# Altium PCB pcb.PcbDoc
Units mm, origin at the board's own origin, x right, y up, seen from the top; angles counter-clockwise.
Board outline 37.77 x 38.74 mm, 2 copper layers (Top Layer, Bottom Layer); 52 components, 48 nets, 239 pads, 66 vias.
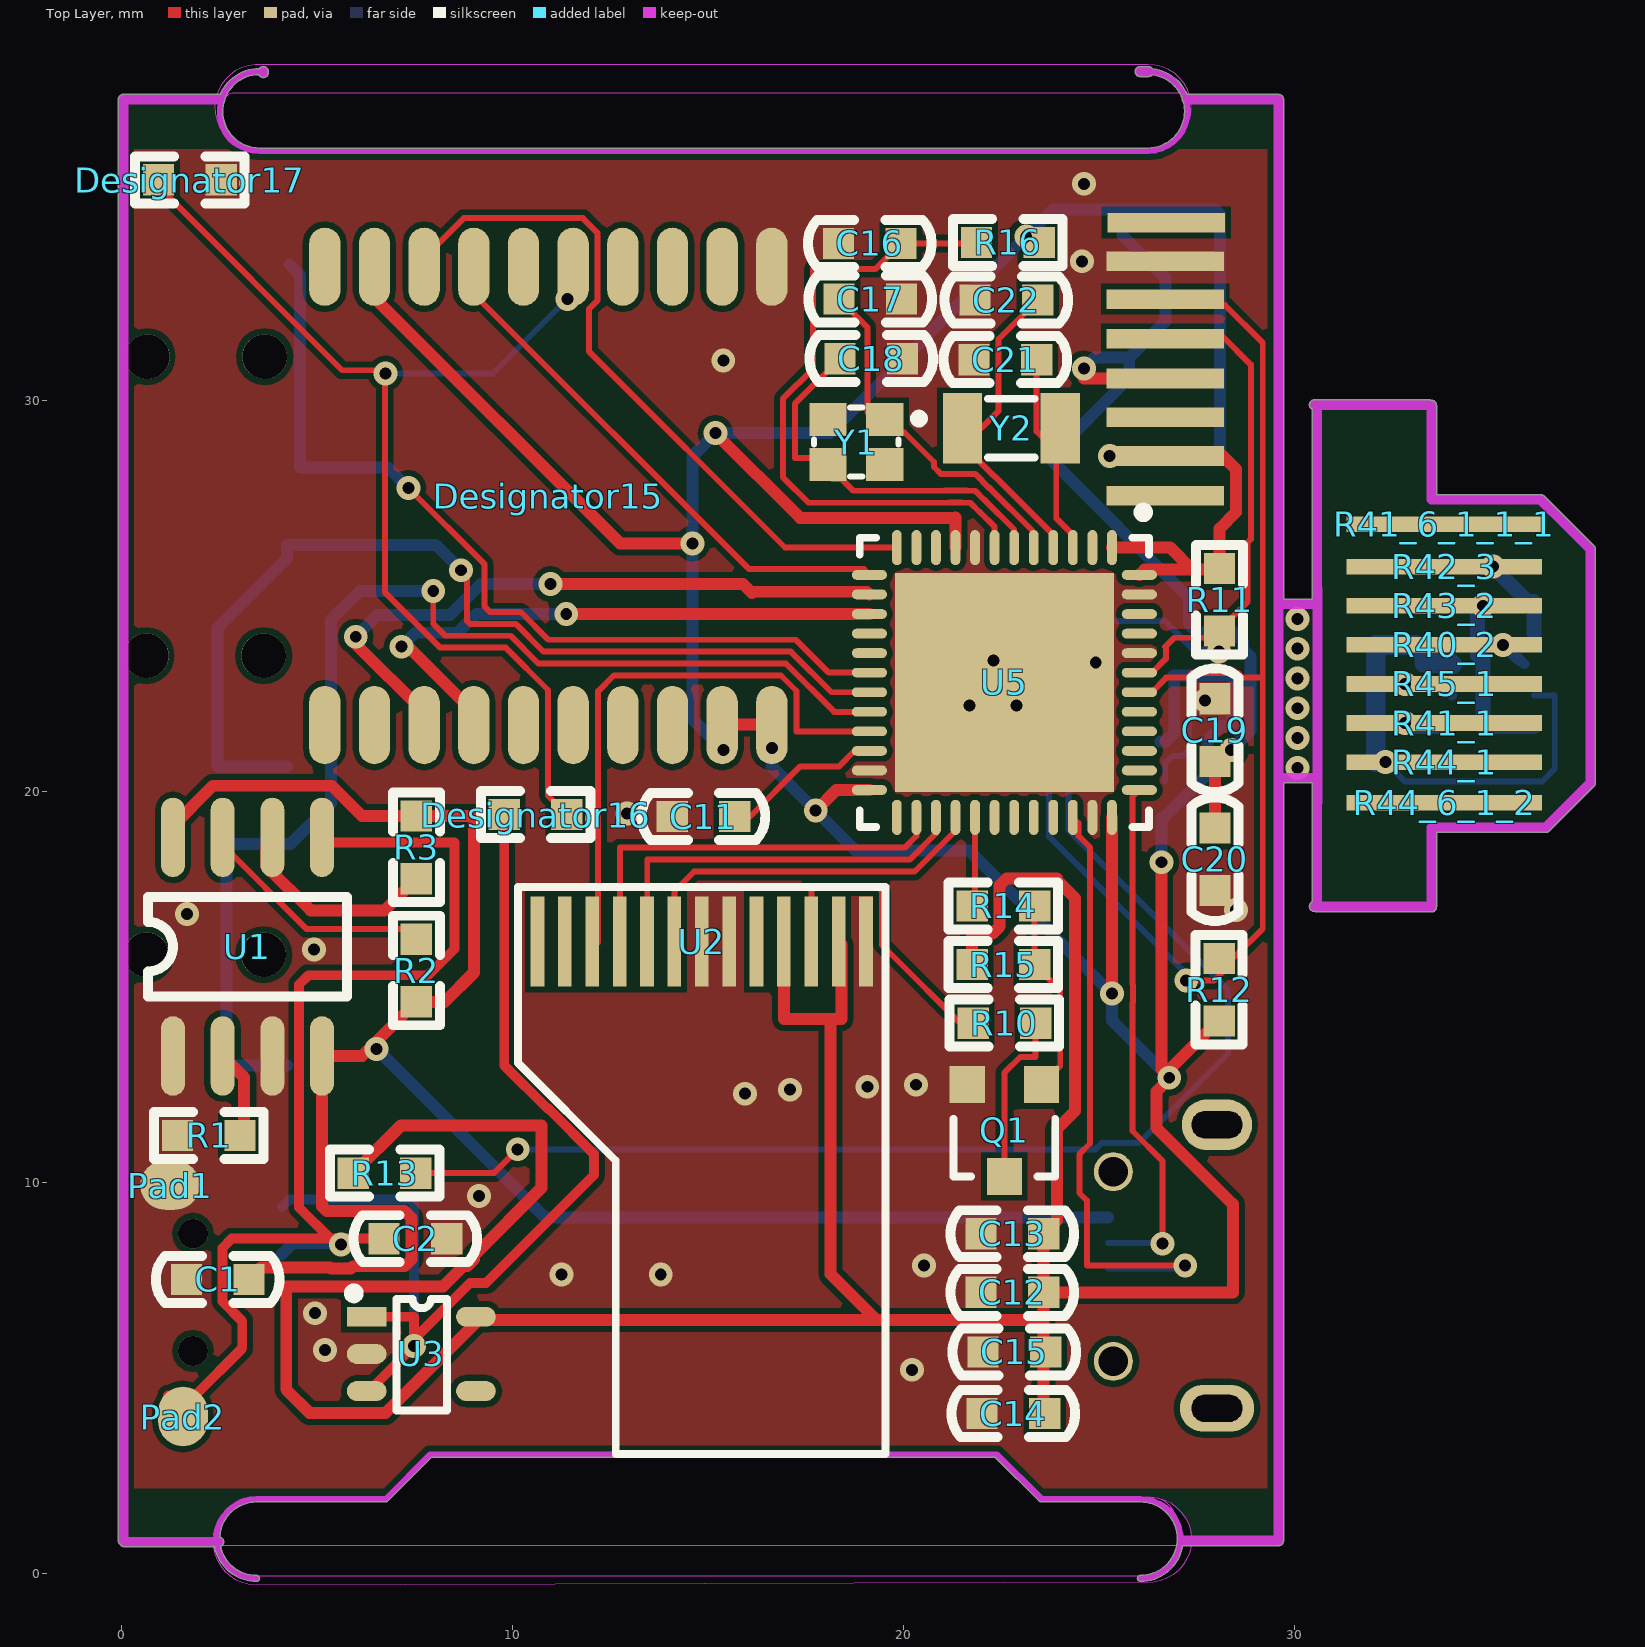
[diagram p0: Top Layer view]
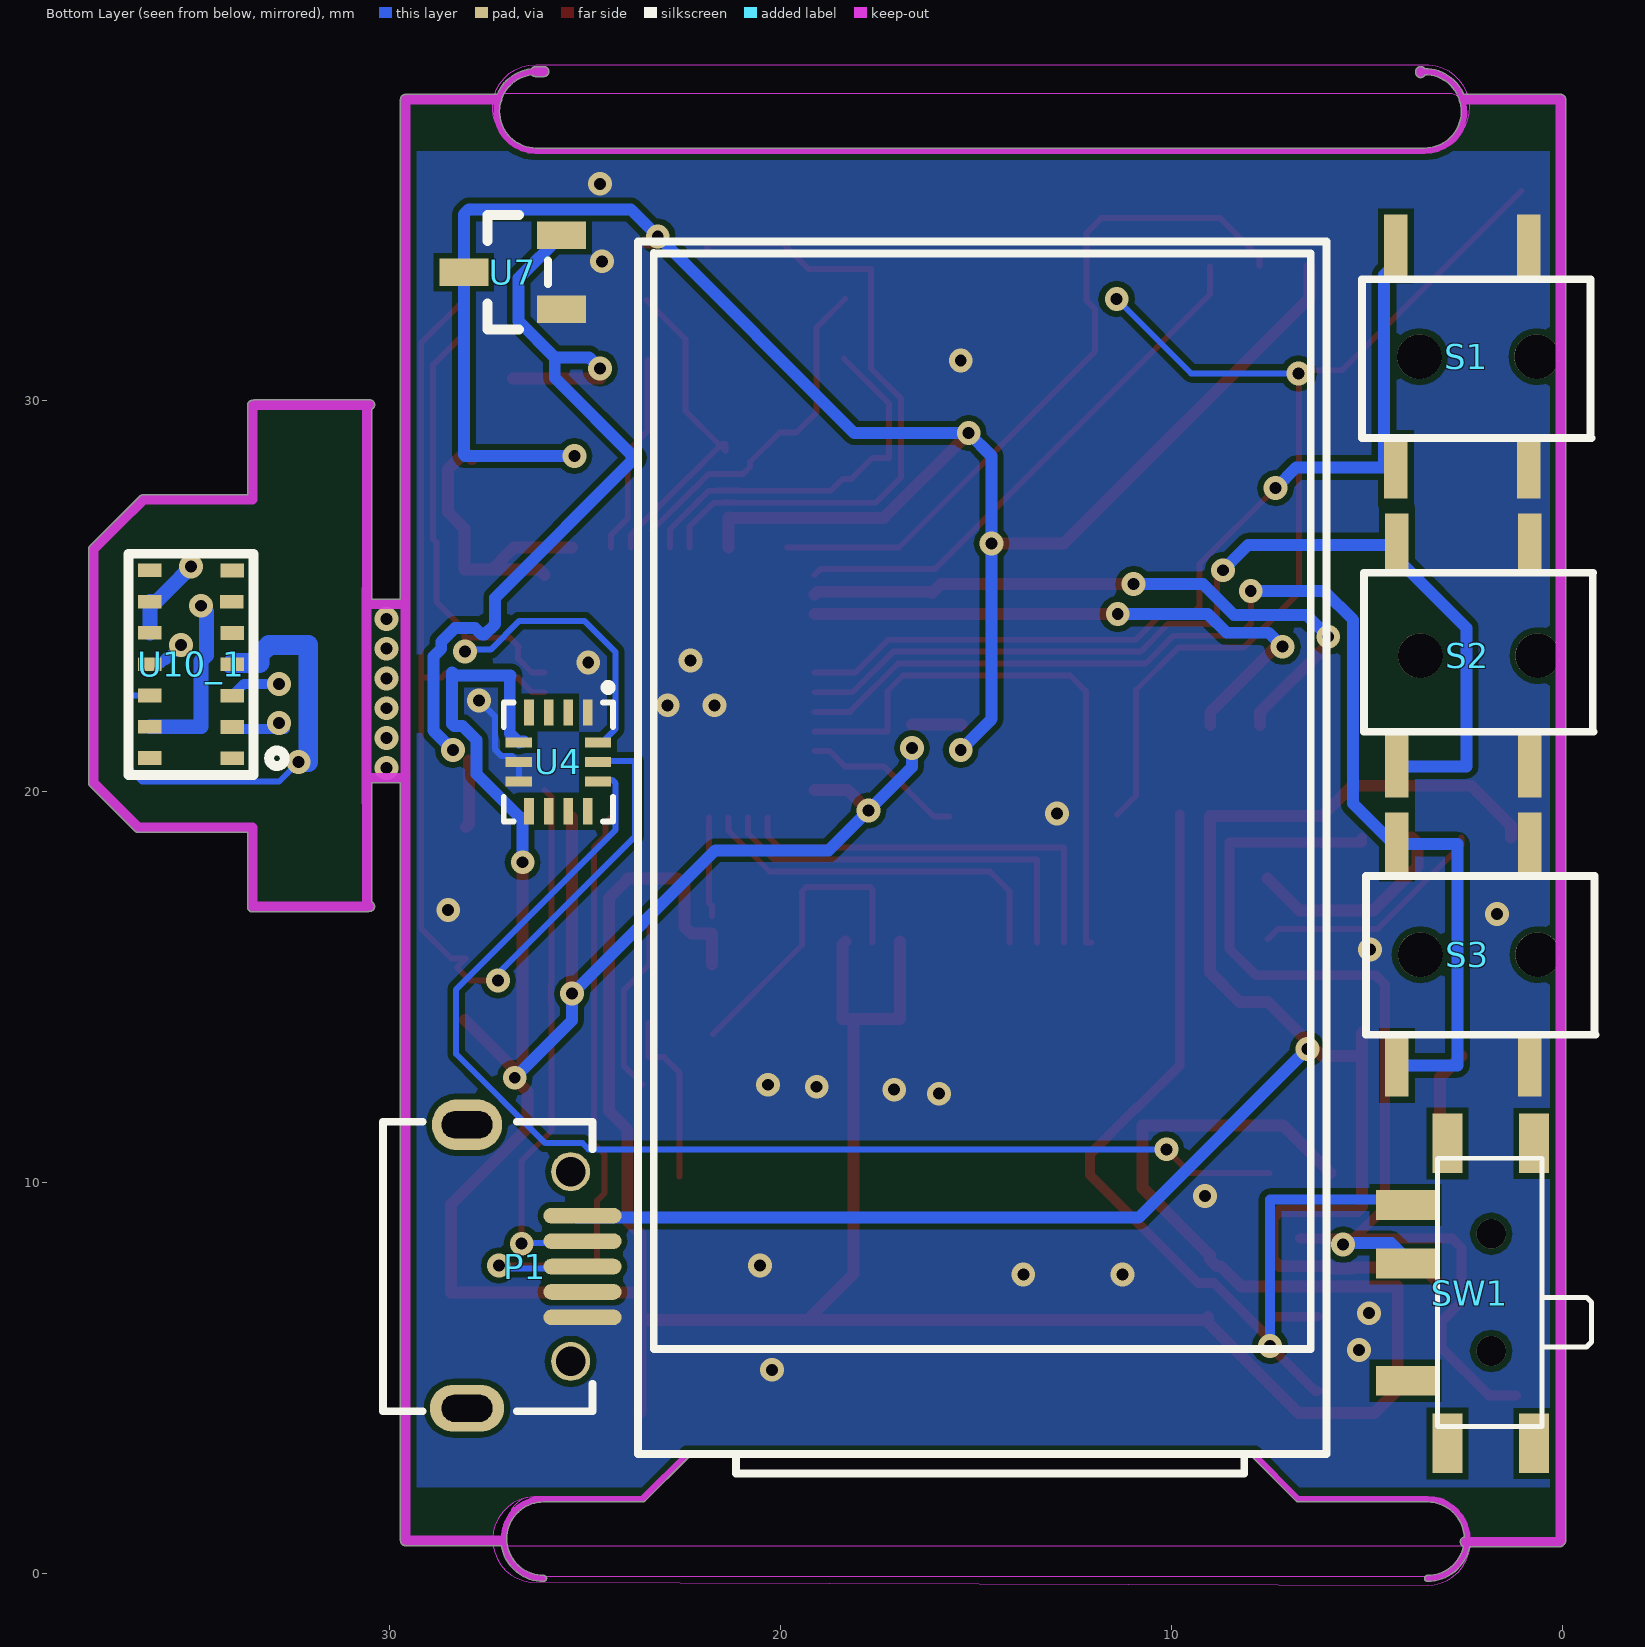
[diagram p1: Bottom Layer view, seen from below]
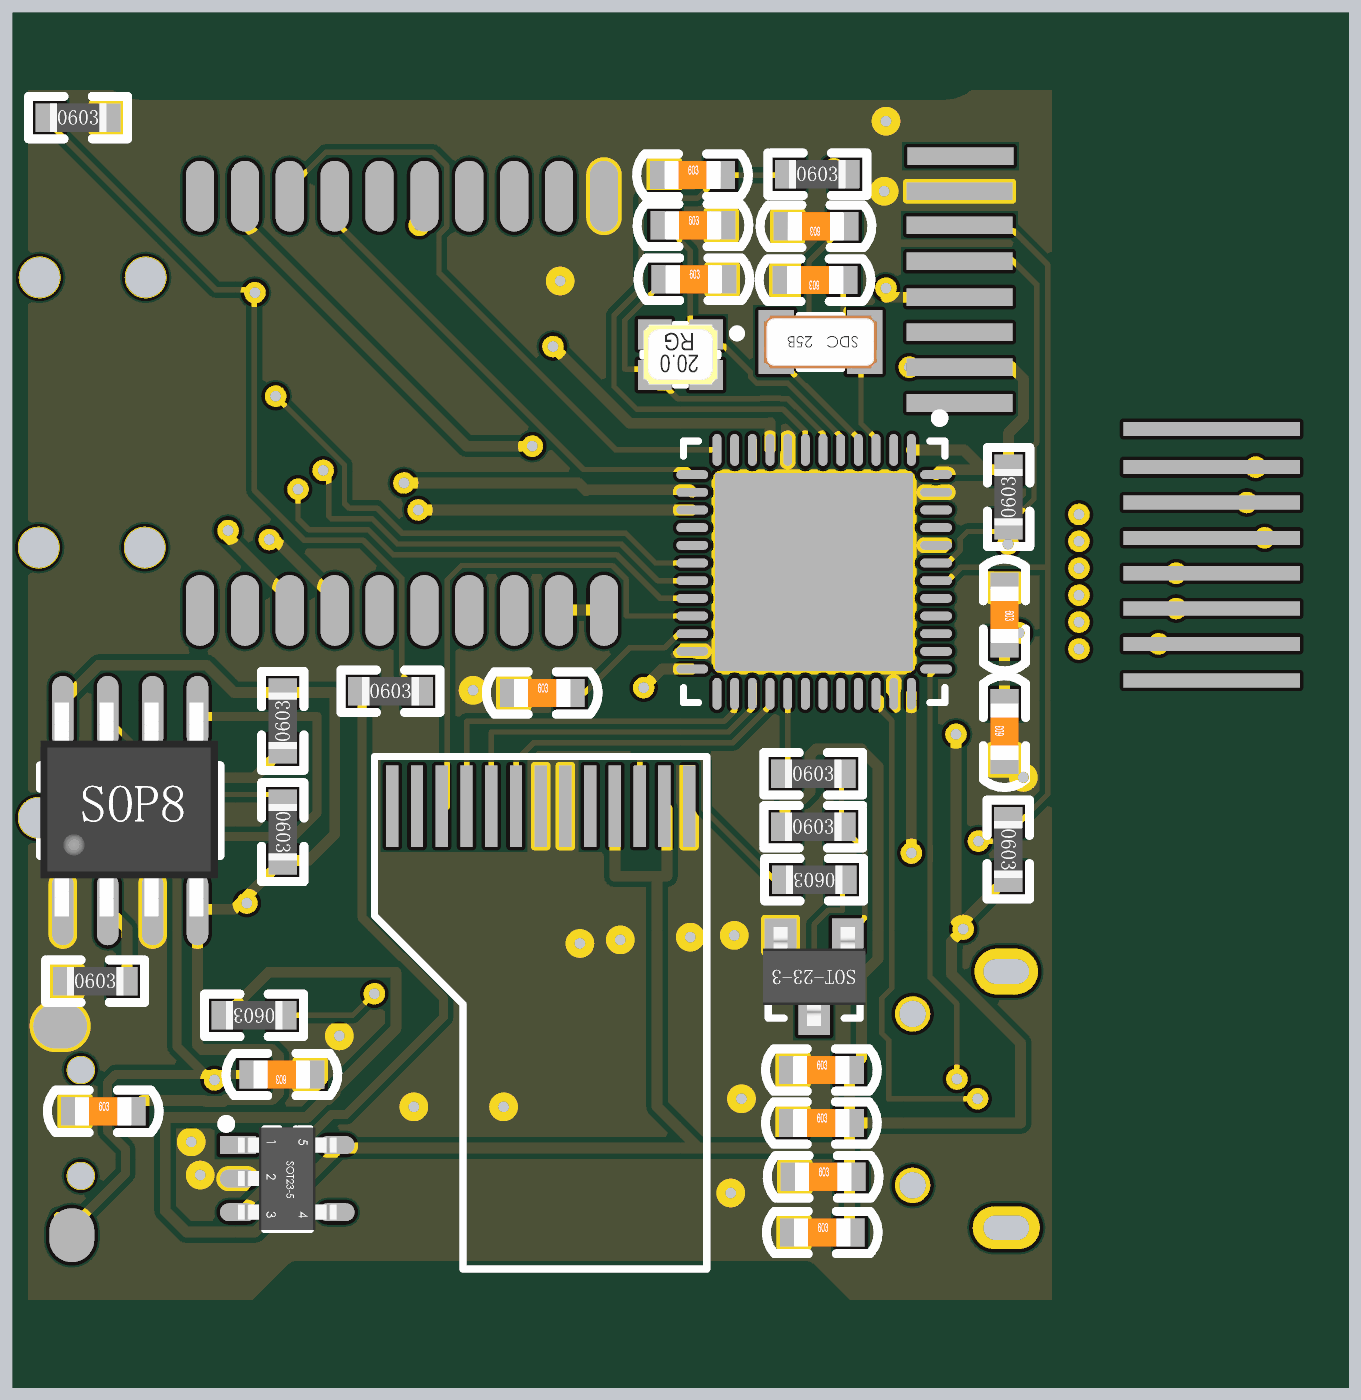
[diagram p2: 3D render of the assembled board from above, using the file's embedded part models]

## Layer stack, top to bottom
Top Solder: solder mask 0.0102, Solder Resist, Dk 3.5
Top Layer: signal copper 0.0356
Dielectric 1: dielectric 0.32, FR-4, Dk 4.8
Bottom Layer: signal copper 0.0356
Bottom Solder: solder mask 0.0102, Solder Resist, Dk 3.5

## Board outline
0.083,0.679 2.382,0.679 ccw(c3.454,0.889) 3.454,-0.204 ccw(c3.454,-0.127) 3.531,-0.127 ccw(c3.454,-0.127) 3.454,-0.05 cw(c3.454,0.889) 2.537,0.688 ccw(c2.489,0.806) 2.617,0.806 ccw(c2.489,0.806) 2.516,0.931 cw(c3.454,0.889) 3.454,1.828 6.756,1.828 ccw(c6.756,1.905) 6.811,1.851 7.931,2.971 22.346,2.971 23.466,1.851 ccw(c23.52,1.905) 23.52,1.828 26.06,1.828 cw(c26.06,0.889) 27,0.889 cw(c26.06,0.889) 26.06,-0.05 ccw(c26.06,-0.127) 26.06,-0.204 ccw(c26.06,0.889) 27.139,0.713 ccw(c27.159,0.838) 27.159,0.711 29.591,0.711 ccw(c29.591,0.838) 29.718,0.838 29.718,20.218 30.449,20.218 30.449,17.17 ccw(c30.507,17.056) 30.507,16.929 30.521,16.929 ccw(c30.577,17.043) 30.577,16.916 33.503,16.916 ccw(c33.503,17.043) 33.63,17.043 33.63,18.948 36.424,18.948 ccw(c36.424,19.075) 36.514,18.986 36.514,18.985 37.657,20.128 37.656,20.128 ccw(c37.567,20.218) 37.694,20.218 37.694,26.187 ccw(c37.567,26.187) 37.656,26.278 37.657,26.277 36.387,27.547 ccw(c36.297,27.457) 36.297,27.585 33.63,27.585 33.63,29.87 ccw(c33.503,29.87) 33.49,29.997 ccw(c33.433,29.883) 33.433,30.011 30.507,30.011 ccw(c30.507,29.883) 30.449,29.77 30.449,24.918 29.718,24.918 29.718,37.694 ccw(c29.591,37.694) 29.591,37.821 27.258,37.821 ccw(c27.258,37.694) 27.251,37.821 ccw(c26.248,37.389) 26.37,38.475 ccw(c26.264,38.405) 26.264,38.532 26.054,38.532 ccw(c26.054,38.405) 26.054,38.277 26.264,38.277 ccw(c26.264,38.405) 26.36,38.322 cw(c26.248,37.389) 27.131,37.709 ccw(c27.258,37.694) 27.161,37.611 cw(c26.248,37.389) 27.187,37.389 cw(c26.248,37.389) 26.263,36.449 cw(c26.248,37.389) 26.262,36.449 26.264,36.449 3.531,36.449 cw(c3.531,37.389) 2.618,37.61 ccw(c2.521,37.694) 2.649,37.694 ccw(c2.521,37.694) 2.648,37.71 cw(c3.531,37.389) 3.516,38.328 ccw(c3.632,38.379) 3.76,38.379 3.76,38.405 ccw(c3.632,38.405) 3.53,38.481 ccw(c3.531,37.389) 2.527,37.821 ccw(c2.521,37.694) 2.521,37.821 0.051,37.821 ccw(c0.051,37.694) -0.077,37.694 -0.077,0.838 ccw(c0.051,0.838) -0.022,0.733 ccw(c0.083,0.806)
cut-out: 2.464,0.711 cw(c3.111,1.003) 2.819,1.651 cw(c3.264,1.46) 3.454,1.905 6.756,1.905 7.899,3.048 22.377,3.048 23.52,1.905 26.06,1.905 cw(c26.314,1.292) 26.568,1.905 cw(c26.317,1.298) 26.96,1.434 cw(c26.623,1.078) 27.113,1.092 cw(c26.653,0.902) 27.113,0.711 21.666,0.711 17.145,0.711 8.128,0.711 5.182,0.711
cut-out: 3.505,36.379 26.238,36.379 ccw(c26.33,37.227) 27.178,37.135 ccw(c26.819,37.493) 27.178,37.852 23.978,37.852 14.503,37.852 5.512,37.852 2.819,37.852 ccw(c3.013,37.328) 2.489,37.135 ccw(c3.375,37.265)
cut-out: 3.505,-0.076 cw(c3.505,0.94) 3.505,1.956 6.807,1.956 7.95,3.099 22.428,3.099 23.571,1.956 26.111,1.956 cw(c26.111,0.94) 26.111,-0.076
cut-out: 3.454,-0.305 cw(c3.48,0.825) 3.505,1.956 6.807,1.956 7.95,3.099 22.428,3.099 23.571,1.956 26.135,1.956 cw(c26.263,0.864) 26.391,-0.229
cut-out: 3.543,36.398 26.276,36.398 ccw(c26.27,37.49) 26.263,38.582 3.43,38.582 ccw(c3.487,37.49)

## Design rules (kind name [scope] priority, off if disabled: settings)
Clearance [All] p1: gap=0.152
ComponentClearance [All] p1 off: gap=0.254 collisioncheckmode=3 verticalgap=0.254 showdistances=FALSE
HoleSize [All] p1 off: absolutevalues=TRUE maxlimit=2.54 minlimit=0.025 maxpercent=80.000 minpercent=20.000
HoleToHoleClearance [All] p1 off: gap=0.254 allowstackedmicrovias=TRUE
LayerPairs [All] p1 off: enforce=TRUE
MinimumSolderMaskSliver [All] p1 off: minsoldermaskwidth=0.254
NetAntennae [All] p1 off: netantennaetolerance=0
PlaneConnect [All] p1: planeconnectstyle=Direct reliefexpansion=0.508 reliefentries=4 reliefconductorwidth=0.254 reliefairgap=0.254
PolygonConnect [All] p1: connectstyle=Direct reliefconductorwidth=0.254 reliefentries=4 polygonreliefangle="90 Angle" airgapwidth=0.254
RoutingVias [All] p1: holewidth=0.305 width=0.61 viastyle="Through Hole" minholewidth=0.305 minwidth=0.61 maxholewidth=0.305 maxwidth=0.61
SilkToSilkClearance [All] p1 off: silktosilkclearance=0.254
SilkToSolderMaskClearance [IsPad] p1 off: minsilkscreentomaskgap=0.254 clearancetoexposedcopper=TRUE
SolderMaskExpansion [All] p1: expansion=0.102
Width [All] p1: maxlimit=2.54 minlimit=0.152 preferedwidth=0.254
21 further rules are at their usual default settings.

## Components (designator, comment, footprint, x,y, rotation, side; value= is the part's Value field where it differs from the comment)
C1 "10uf" 电容_C0603 2.464,7.518 r0 top
C2 "10uf" 电容_C0603 7.518,8.56 r180 top
C11 "2.2uF" 电容_C0603 14.884,19.355 r0 top
C12 "1uF" 电容_C0603 22.784,7.188 r0 top
C13 "1uF" 电容_C0603 22.784,8.687 r0 top
C14 "1uF" 电容_C0603 22.809,4.089 r0 top
C15 "1uF" 电容_C0603 22.835,5.664 r0 top
C16 "100nf" 电容_C0603 19.139,34.011 r0 top
C17 "22pf" 电容_C0603 19.152,32.588 r0 top
C18 "22pf" 电容_C0603 19.177,31.064 r0 top
C19 "100nf" 电容_C0603 27.965,21.565 r270 top
C20 "10uf" 电容_C0603 27.965,18.263 r90 top
C21 "22pf" 电容_C0603 22.606,31.039 r180 top
C22 "22pf" 电容_C0603 22.631,32.563 r180 top
Designator15 "Comment" HDR10_1.27 5.156,34.011 r0 top
Designator16 "10K" 电阻_R0603 10.592,19.406 r0 top
Designator17 "10K" 电阻_R0603 1.753,35.636 r0 top
P1 "MICRO USB" USB 28.042,7.874 r270 bottom
Pad1 "GND" Pad_A 1.245,9.931 r180 top
Pad2 "BAT" Pad_A 1.575,4.013 r270 top
Q1 "S8050" 三极管_SOT-23 22.581,11.328 r180 top
R1 "1.2k" 电阻_R0603 2.235,11.201 r0 top
R2 "2k" 电阻_R0603 7.544,15.418 r270 top
R3 "2k" 电阻_R0603 7.544,18.567 r90 top
R10 "10R" 电阻_R0603 22.581,14.072 r180 top
R11 "10k" 电阻_R0603 28.082,24.9 r90 top
R12 "10k" 电阻_R0603 28.072,14.927 r270 top
R13 "10k" 电阻_R0603 6.731,10.236 r180 top
R14 "1K" 电阻_R0603 22.555,17.069 r0 top
R15 "10K" 电阻_R0603 22.555,15.57 r0 top
R16 "10K" 电阻_R0603 22.67,34.036 r0 top
R40_2 "Res1" 0603_R#1 35.005,17.196 r180 bottom (schematic designator R34)
R41_1 "Res1" 0603_R#2 34.827,14.147 r180 bottom (schematic designator R34)
R41_6_1_1_1 "Res1" 0603_R#3 38.383,19.227 r180 bottom (schematic designator R34)
R42_3 "Res1" 0603_R#4 35.005,20.245 r180 bottom (schematic designator R34)
R43_2 "Res1" 0603_R#5 34.827,18.721 r180 bottom (schematic designator R34)
R44_1 "Res1" 0603_R#6 34.577,17.245 r180 bottom (schematic designator R34)
R44_6_1_2 "Res1" 0603_R#7 38.063,16.21 r180 bottom (schematic designator R34)
R45_1 "Res1" 0603_R#8 34.827,15.671 r180 bottom (schematic designator R34)
S1 "SW-PB" KEY_3.5*4.7 0.914,31.115 r270 bottom
S2 "SW-PB" KEY_3.5*4.7 0.889,23.47 r270 bottom
S3 "SW-PB" KEY_3.5*4.7 0.889,15.824 r270 bottom
SW1 "SPDT" 贴片开关 -0.229,4.14 r90 bottom
U1 "TP4056" SOP8 1.295,13.259 r90 top
U2 "IPS-LCD" 1.14IPS-LCD 32.042,9.454 r270 bottom
U3 "Comment" SOT23-5 7.671,5.613 r0 top
U4 "BMI160" LGA-14_L3.0-W2.5-P0.50-BL 25.679,20.752 r0 bottom
U5 "STM32F401CCU6" STM-UFQFPN48_N 22.581,22.784 r270 top
U7 "1.8V" SOT-23-3_L2.9-W1.6-P1.90-LS2.8-BR 26.848,33.274 r180 bottom
U10_1 "MAX30100" SENSOR-SMD_MAX30100EFD+ 35.077,23.245 r90 bottom (schematic designator U10)
Y1 "XTAL" 晶振_2016 18.796,28.931 r180 top
Y2 "32.768K" 晶振_3215 22.758,29.286 r180 top

## Footprints (in the part's own frame and the unit in brackets; to place one, negate y for a bottom-side part, rotate by r counter-clockwise, add the part's x,y. Pads: shape width x height; smd on the part's side, far side on the other; paste and mask are expansions set on the pad)
1.14IPS-LCD [mm] "1.14寸IPS-LCD裸屏SPI接口"
  rect 2.3x0.35 smd far side: 1(-6.7,21.4) 2(-6.7,20.7) 3(-6.7,20) 4(-6.7,19.3) 5(-6.7,18.6) 6(-6.7,17.9) 7(-6.7,17.2) 8(-6.7,16.5) 9(-6.7,15.8) 10(-6.7,15.1) 11(-6.7,14.4) 12(-6.7,13.7) 13(-6.7,13)
  silkscreen extent -24.6,8.4 6.9,26
0603_R#1 [mm]
  rect 5x0.4 smd far side: 2(1.179,6.549)
0603_R#2 [mm]
  rect 5x0.4 smd far side: 2(1,7.599)
0603_R#3 [mm]
  rect 5x0.4 smd far side: 2(4.556,7.599)
0603_R#4 [mm]
  rect 5x0.4 smd far side: 2(1.179,5.5)
0603_R#5 [mm]
  rect 5x0.4 smd far side: 2(1,6.025)
0603_R#6 [mm]
  rect 5x0.4 smd far side: 2(0.75,3.5)
0603_R#7 [mm]
  rect 5x0.4 smd far side: 2(4.236,3.5)
0603_R#8 [mm]
  rect 5x0.4 smd far side: 2(1,7.074)
HDR10_1.27 [mm]
  oval 0.8x2 smd: 1(11.476,-12.319) 1(11.476,-0.597) 2(10.206,-12.319) 2(10.206,-0.597) 3(8.936,-12.319) 3(8.936,-0.597) 4(7.666,-12.319) 4(7.666,-0.597) 5(6.396,-12.319) 5(6.396,-0.597) 6(5.126,-12.319) 6(5.126,-0.597) 7(3.856,-12.319) 7(3.856,-0.597) 8(2.586,-12.319) 8(2.586,-0.597) 9(1.316,-12.319) 9(1.316,-0.597) 10(0.046,-12.319) 10(0.046,-0.597)
KEY_3.5*4.7 [mil]
  round 45 hole 45: 0(0,-108.23) 0(0,9.88)
  rect 62.99x23.62 smd: 1(-111.5,-131.85) 1(111.5,-131.85) 2(-111.5,2.02) 2(111.5,2.02)
LGA-14_L3.0-W2.5-P0.50-BL [mm]
  rect 0.25x0.675 smd: 1(-0.75,-1.263) 2(-0.25,-1.263) 3(0.25,-1.263) 4(0.75,-1.263) 8(0.75,1.263) 9(0.25,1.263) 10(-0.25,1.263) 11(-0.75,1.263)
  rect 0.675x0.25 smd: 5(1.013,-0.5) 6(1.013,0) 7(1.013,0.5) 12(-1.013,0.5) 13(-1.013,0) 14(-1.013,-0.5)
  silkscreen extent -1.4,-1.97 1.4,1.52
Pad_A [mil]
  oval 60x50 smd: 1(0,0)
SENSOR-SMD_MAX30100EFD+ [mm]
  rect 0.35x0.6 smd: 1(-2.403,-1.054) 2(-1.598,-1.052) 3(-0.798,-1.052) 4(0.002,-1.052) 5(0.802,-1.052) 6(1.604,-1.048) 7(2.402,-1.052) 8(2.406,1.049) 9(1.606,1.049) 10(0.805,1.049) 11(0.006,1.049) 12(-0.795,1.049) 13(-1.595,1.049) 14(-2.395,1.049)
  silkscreen extent -2.83,-2.4 2.83,1.6
SOP8 [mil]
  oval 80x24 smd: 1(-1,-1) 2(-1,-51) 3(-1,-101) 4(-1,-151) 5(219,-151) 6(219,-101) 7(219,-51) 8(219,-1)
  silkscreen extent 59,-176 159,24, body extent -9,-174 229,24, height 63
SOT23-5 [mil]
  rect 40x20 smd: 1(-55,37.4)
  oval 40x20 smd: 2(-55,0) 3(-55,-37.4) 4(55,-37.4) 5(55,37.4)
  silkscreen extent -73,-57 26,66, body extent -55,-57 55,57, height 43
SOT-23-3_L2.9-W1.6-P1.90-LS2.8-BR [mm]
  rect 1.25x0.7 smd: 1(1.25,-0.95) 2(1.25,0.95) 3(-1.25,0)
  silkscreen extent -0.65,-1.46 0.9,1.46
STM-UFQFPN48_N [mm] "QFN, 48-Leads, Body 7.1x7.1mm, Pitch 0.5mm, Thermal Pad 5.6x5.6mm, IPC Medium Density"
  oval 0.9x0.25 smd: 1(-3.45,2.75) 2(-3.45,2.25) 3(-3.45,1.75) 4(-3.45,1.25) 5(-3.45,0.75) 6(-3.45,0.25) 7(-3.45,-0.25) 8(-3.45,-0.75) 9(-3.45,-1.25) 10(-3.45,-1.75) 11(-3.45,-2.25) 12(-3.45,-2.75) 25(3.45,-2.75) 26(3.45,-2.25) 27(3.45,-1.75) 28(3.45,-1.25) 29(3.45,-0.75) 30(3.45,-0.25) 31(3.45,0.25) 32(3.45,0.75) 33(3.45,1.25) 34(3.45,1.75) 35(3.45,2.25) 36(3.45,2.75)
  oval 0.25x0.9 smd: 13(-2.75,-3.45) 14(-2.25,-3.45) 15(-1.75,-3.45) 16(-1.25,-3.45) 17(-0.75,-3.45) 18(-0.25,-3.45) 19(0.25,-3.45) 20(0.75,-3.45) 21(1.25,-3.45) 22(1.75,-3.45) 23(2.25,-3.45) 24(2.75,-3.45) 37(2.75,3.45) 38(2.25,3.45) 39(1.75,3.45) 40(1.25,3.45) 41(0.75,3.45) 42(0.25,3.45) 43(-0.25,3.45) 44(-0.75,3.45) 45(-1.25,3.45) 46(-1.75,3.45) 47(-2.25,3.45) 48(-2.75,3.45)
  rect 5.6x5.6 smd: 49(0,0)
  silkscreen extent -4.47,-3.7 3.7,3.7, body extent -3.55,-3.55 3.55,3.55, height 0.6
USB [mm]
  oval 1.3x1.8 hole 0.7 slot 1.3 at 90 deg: 0(-3.6,0.025)
  round 1 hole 0.75: 0(-2.4,2.675) 0(2.45,2.675)
  oval 1.2x1.9 hole 0.7 slot 1.3 at 90 deg: 0(3.65,0.025)
  oval 0.4x2 smd: 1(-1.275,2.975) 2(-0.625,2.975) 3(0.025,2.975) 4(0.675,2.975) 5(1.325,2.975)
  silkscreen extent -3.67,-2.12 3.73,3.24, body extent -4,-2.64 4.05,2.94, height 2.72
三极管_SOT-23 [mm]
  rect 0.9x0.95 smd: 1(-0.95,-1.175) 2(0,1.175) 3(0.95,-1.175)
  silkscreen extent -1.3,-0.3 1.3,1.18, body extent -1.45,-1.4 1.45,1.4, height 1.2
晶振_2016 [mm]
  rect 0.95x0.85 smd: 0(-0.725,0.575) 0(0.725,-0.575) 1(-0.725,-0.575) 2(0.725,0.575)
  silkscreen extent -1.7,-0.88 1.08,0.88, body extent -1.05,-0.85 1.05,0.85, height 0.56
晶振_3215 [mm] "XTAL SMD 3.2 x 1.5 mm"
  rect 1x1.8 smd: 1(-1.25,0) 2(1.25,0)
  silkscreen extent -0.6,-0.75 0.6,0.75, body extent -1.6,-0.75 1.6,0.75, height 0.81
电容_C0603 [mm]
  rect 0.8x0.8 smd: 1(-0.8,0) 2(0.8,0)
  silkscreen extent -1.58,-0.6 1.58,0.6, body extent -0.8,-0.4 0.8,0.4, height 0.3
电阻_R0603 [mm]
  rect 0.8x0.8 smd: 1(-0.8,0) 2(0.8,0)
  silkscreen extent -1.4,-0.6 1.4,0.6, body extent -0.8,-0.4 0.8,0.4, height 0.45
贴片开关 [mil]
  rect 60x30 smd: 0(-32,38) 0(-32,125) 0(270,38) 0(270,125)
  rect 30x60 smd: 1(31,167) 2(149,167) 3(208,167)
  silkscreen extent -15,-20 255,135, body extent -32,-21 272,168, height 55

## Part data
C1 C2 C11 C12 C13 C14 C15 C16 C17 C18 C21 C22: library part cap
C19 C20: library part CAP, "Capacitor"
P1: library part "MICRO USB 5PIN"
Pad1 Pad2: library part Pad
Q1: library part Triode-NPN
R1 R2 R3 R10 R14 R15 R16: library part Res
R11 R12 R13: library part Res1, "贴片电阻"
R40_2 R41_1 R41_6_1_1_1 R42_3 R43_2 R44_1 R44_6_1_2 R45_1: "贴片电阻"
S1 S2 S3: "按键"
SW1: library part SW_SPDT, "开关-两档"
U2: library part IPS-LCD-1.14, "IPS-LCD-1.14寸裸屏spi接口"
U5: "ARM Cortex-M4 32-bit MCU+FPU, 105 DMIPS, 256 kB Flash, 64 kB Internal RAM, 36 I/Os, 48-pin UFQFPN, -40 to 85 degC, Tray"
U7: library part VOLTREG
Y2: library part XTAL_A

## Free pads (board coordinates)
  rect 3x0.5 smd: 0(26.695,27.559) 0(26.695,28.575) 0(26.695,29.566) 0(26.695,30.556) 0(26.695,31.572) 0(26.695,32.588) 0(26.695,33.553) 0(26.721,34.544)

## Via types
v1: diameter 0.61, hole 0.305, Top Layer to Bottom Layer, 64 vias
v2: diameter 0.762, hole 0.762, Top Layer to Bottom Layer, 2 vias

## Nets (pads, with @x,y where several pads share a name; then routed paths per layer and width w, separated by ;. In a path a pad name is that pad's centre, name@x,y a point inside that pad or via, vN(x,y) a via of type N, cw(c..) or ccw(c..) an arc to the next point about the centre after c; other vN are vias at no path point)
3V3: C12.2 C13.2 C14.2 C15.2 Designator15.1@16.632,21.692 Designator15.2@15.362,21.692 Designator15.9@6.472,33.414 pad.0@26.695,28.575 R11.2 R12.2 R13.2 R15.1 R16.2 U2.10 U2.12 U3.5 U4.5 U4.8 U5.1 U5.9 U5.24 U5.36 U5.48 U7.3 | length 179.9
  Top Layer w0.305: R13.2 7.15,11.455 10.744,11.455 10.744,9.859 9.023,8.138 9.023,8.034 8.845,7.855 8.74,7.855 8.226,7.341 4.216,7.341 4.216,4.699 4.811,4.105 6.759,4.105 9.068,6.413 U3.5@9.068,6.483 ; Designator15.9@6.477,33.426 6.477,32.614 12.751,26.34 v1(14.605,26.34) ; U3.5 U3.5@9.068,6.483 ; v1(15.189,29.159) 17.358,26.991 21.316,26.991 21.331,27.006 U5.9 ; Designator15.2@15.367,21.704 Designator15.1@16.637,21.704 ; U2.10 16.942,14.173 18.136,14.173 ; v1(17.755,19.507) 18.281,20.034 U5.24 ; U2.12 18.415,16.081 18.415,14.173 18.136,14.173 ; R15.1 21.755,16.364 22.281,16.364 22.46,16.543 22.46,17.595 22.639,17.774 23.92,17.774 23.92,17.735 24.39,17.265 24.39,11.828 23.92,11.359 23.92,9.023 C13.2 C12.2 ; R16.2@23.139,34.036 R16.2 ; C14.2 23.584,4.115 23.584,6.617 ; v1(25.331,14.827) U5.36 ; U5.1 26.817,26.234 27.381,25.67 ; U5.48 26.167,25.67 27.381,25.67 ; v1@26.594,12.901 v1(26.594,18.186) ; v1@26.82,12.675 26.467,12.322 26.467,11.401 28.423,9.445 28.423,7.188 C12.2 ; v1@26.82,12.905 R12.2@28.072,14.157 ; pad.0@27.889,28.499 28.016,28.626 28.118,28.626 28.502,28.242 28.502,27.135 28.082,26.716 R11.2 28.082,25.67 27.381,25.67 ; U3.5@9.068,6.483 19.304,6.483 ; 18.136,14.173 18.136,7.652 19.304,6.483 ; 19.304,6.483 23.451,6.483 23.584,6.617 ; 23.584,6.617 C12.2
  Bottom Layer w0.305: v1(15.392,21.057) 14.605,21.844 v1(14.605,26.34) 14.605,28.575 v1(15.189,29.159) 18.11,29.159 v1(23.139,34.188) 23.83,34.879 27.971,34.879 28.097,34.752 U7.3 28.097,28.605 28.067,28.575 v1(25.273,28.575) ; v1(16.637,21.107) 16.637,20.625 v1(17.755,19.507) 18.771,18.491 21.666,18.491 v1(25.331,14.827) 25.331,14.141 v1(26.797,12.675) ; U4.5@26.565,21.277 U4.5@26.718,21.277 ; v1(26.594,18.186) 26.594,19.325 26.659,19.325 27.77,20.436 27.77,21.309 28.127,21.666 28.343,21.666 28.397,21.721 28.397,23.039 28.32,22.962 26.902,22.962 26.924,22.939 26.924,21.483 U4.5@26.718,21.277 ; U4.5 U4.5@26.718,21.277
BAT: C2.2 Pad2.1 SW1.2 U1.5 | length 28.5
  Top Layer w0.254: Pad2.1@1.194,4.547 1.88,4.547 3.092,5.759 3.092,6.449 2.584,6.956 2.584,8.325 2.819,8.56 5.346,8.56 ; U1.5 5.131,18.688 8.515,18.688 8.515,15.97 7.842,15.297 4.782,15.297 4.547,15.062 4.547,9.359 5.346,8.56 ; C2.2 5.346,8.56
  Bottom Layer w0.305: SW1.2@4.089,8.153 4.384,8.448 v1@5.639,8.448
  other v1: 5.613,8.407
BAT_SW: Designator16.1 SW1.3 U3.1 U3.3 | length 27.4
  Top Layer w0.254: U3.3 6.332,4.663 v1(7.483,5.814) v1@7.483,5.987 ; U3.1 7.483,6.563 v1@7.483,5.987 ; Designator16.1 9.792,12.992 10.897,11.887 10.923,11.887 12.09,10.72 12.09,10.185 9.328,7.423 8.919,7.423 v1@7.483,5.987
  Bottom Layer w0.254: SW1.3@4.112,9.373 4.3,9.561 7.483,9.561 v1(7.483,5.814)
GND: C1.1 C2.1 C11.1 C12.1 C13.1 C14.1 C15.1 C16.1 C17.2 C18.2 C19.1 C20.1 C21.2 C22.2 Designator15.1@16.632,33.414 Designator17.2 P1.5 Pad1.1 pad.0@26.695,33.553 Q1.3 R1.1 S1.2 S2.2 S3.2 U1.1 U1.3 U2.7 U2.8 U2.13 U3.2 U4.1 U4.6 U4.7 U5.8 U5.23 U5.35 U5.44 U5.47 U5.49 U7.1 | length 2.7
  Bottom Layer w0.152: U4.7 U4.6 26.731,20.752 26.878,20.898 27.125,20.898 27.305,21.079 27.305,21.92 v1(27.711,22.327)
  other v1: 20.218,5.207 5.207,5.715 4.953,6.655 11.252,7.645 13.792,7.645 20.523,7.874 9.144,9.652 15.951,12.268 17.094,12.37 19.075,12.446 20.32,12.497 4.928,15.951 1.676,16.866 28.499,16.967 12.929,19.431 21.692,22.2 22.885,22.2 24.917,23.292 22.301,23.343 15.392,31.013 24.562,33.553 24.613,35.535
KEY1: S1.1 U5.18 | length 22.7
  Top Layer w0.152: v1(7.341,27.755) 9.289,25.806 9.289,24.722 9.423,24.587 10.208,24.587 10.92,23.876 17.248,23.876 18.09,23.034 U5.18
  Bottom Layer w0.305: S1.1@4.293,33.477 4.572,33.198 4.572,28.283 6.812,28.283 v1(7.341,27.755)
KEY2: S2.1 U5.19 | length 25.3
  Top Layer w0.152: v1(8.687,25.654) 8.839,25.502 8.839,24.359 8.915,24.282 10.082,24.282 10.793,23.571 17.121,23.571 18.159,22.534 U5.19
  Bottom Layer w0.305: S2.1@4.238,20.637 2.464,20.637 2.464,24.181 4.238,25.955 4.238,26.302 8.039,26.302 v1(8.687,25.654)
KEY3: S3.1 U5.20 | length 30.8
  Top Layer w0.152: v1(7.976,25.121) 7.976,24.282 8.28,23.978 9.956,23.978 10.667,23.266 16.995,23.266 18.228,22.034 U5.20
  Bottom Layer w0.305: S3.1@4.238,12.992 2.693,12.992 2.693,18.656 4.238,18.656 4.331,18.656 5.359,19.685 5.359,24.384 6.096,25.121 v1(7.976,25.121)
NetC4_1: Designator15.5@11.552,33.414 Designator16.2 Designator17.1 | length 27.3
  Top Layer w0.152: Designator17.1@1.054,35.357 5.644,30.767 6.739,30.767 6.739,25.088 8.154,23.673 9.83,23.673 10.911,22.592 10.911,19.887 Designator16.2
  Bottom Layer w0.152: v1(6.756,30.683) 9.5,30.683 v1(11.405,32.588)
NetC6_1: 
NetC10_2: 
NetC19_2: C19.2 C20.2 pad.0@26.695,30.556 U7.2 | length 23.4
  Top Layer w0.152: v1@24.613,30.556 v1(24.613,30.81)
  Top Layer w0.305: v1@24.613,30.556 26.695,30.556 pad.0@26.848,30.556 ; C19.2@27.965,20.795 C19.2 27.965,19.16 C20.2@28.042,19.083
  Bottom Layer w0.305: v1(24.613,30.81) 24.895,31.093 25.773,31.093 ; U7.2 26.695,33.127 26.695,32.015 25.773,31.093 ; v1(28.38,21.057) 28.879,21.556 28.879,23.443 28.677,23.646 28.677,23.824 28.32,24.181 27.814,24.181 27.637,24.003 27.572,24.003 27.298,24.277 27.298,24.95 23.724,28.524 25.773,30.574 25.773,31.093
NetD1_A: 
NetD1_K: R2.1 U1.7 | length 6.1
  Top Layer w0.152: U1.7 2.591,18.626 4.732,16.485 7.277,16.485 R2.1
NetD2_A: 
NetD2_K: R3.1 U1.6 | length 5.4
  Top Layer w0.305: U1.6 3.708,18.669 3.708,18.085 4.838,16.955 6.732,16.955 R3.1
NetL1_1: 
NetL1_2: 
NetQ1_1: Q1.1 R14.2 R15.2 | length 4.8
  Top Layer w0.152: R14.2@23.355,16.815 R15.2 24.009,14.916 24.009,12.982 Q1.1
NetQ1_2: Q1.2 R10.1 | length 4.5
  Top Layer w0.152: Q1.2 22.581,12.802 22.986,13.207 23.381,13.207 R10.1
NetR1_2: R1.2 U1.2 | length 2.3
  Top Layer w0.305: U1.2 3.137,12.687 R1.2@3.137,11.201
NetR6_1: 
NetR7_2: 
NetR8_2: 
NetR13_1: R13.1 U4.12 | length 30.8
  Top Layer w0.152: R13.1@7.501,10.236 R13.1 9.525,10.236 v1(10.135,10.846)
  Bottom Layer w0.152: v1(10.135,10.846) 24.908,10.846 25.064,11.002 26.014,11.002 28.296,13.284 28.296,14.935 24.217,19.014 24.217,20.204 24.308,20.295
NetR19_2: 
NetU7_2: 
OSC32_IN: C21.1 U5.3 Y2.1 | length 5.2
  Top Layer w0.152: C21.1 23.406,29.203 23.907,28.702 23.907,26.983 24.331,26.559 U5.3
OSC32_OUT: C22.1 U5.4 Y2.2 | length 8.5
  Top Layer w0.152: Y2.2@21.407,28.88 21.407,28.702 Y2.2@21.547,28.842 ; Y2.2@21.458,28.88 21.51,28.88 Y2.2@21.547,28.842 ; C22.1 22.435,31.566 22.435,29.73 Y2.2@21.547,28.842 ; U5.4 23.831,26.559 22.333,28.056 22.324,28.056 21.547,28.832 Y2.2@21.547,28.842
OSC_IN: C17.1 U5.5 Y1.1 | length 8.7
  Top Layer w0.152: C17.1 19.075,31.864 19.075,29.697 19.597,29.175 20.024,29.175 20.78,28.42 20.78,28.292 20.954,28.117 21.832,28.117 22.197,27.751 22.207,27.751 U5.5@23.29,26.668
OSC_OUT: C18.1 U5.6 Y1.2 | length 9.9
  Top Layer w0.152: C18.1 17.221,29.908 17.221,28.522 17.651,28.522 18.184,27.989 18.41,27.989 18.713,27.686 21.041,27.686 21.047,27.691 21.615,27.691 21.62,27.686 21.831,27.686 22.071,27.446 22.081,27.446 22.831,26.697 U5.6
PA2: Designator15.8@7.742,33.414 U5.12 | length 18.3
  Top Layer w0.152: Designator15.8@7.747,33.426 7.747,33.645 8.757,34.655 11.8,34.655 12.181,34.274 12.181,32.553 11.963,32.336 11.963,31.242 16.972,26.234 U5.12
PA3: Designator15.7@9.012,33.414 U5.13 | length 13.8
  Top Layer w0.152: Designator15.7@9.017,33.426 9.017,32.715 16.053,25.679 18.985,25.679 U5.13
PA4: Designator15.8@7.742,21.692 U5.14 | length 16.8
  Top Layer w0.305: v1(5.994,23.952) 5.994,23.766 7.742,22.018 Designator15.8@7.742,21.692 ; v1(10.973,25.298) 15.9,25.298 16.122,25.077 16.15,25.104 19.06,25.104 U5.14
  Bottom Layer w0.305: v1(5.994,23.952) 6.553,24.511 8.406,24.511 9.193,25.298 v1(10.973,25.298)
PA5: Designator15.7@9.012,21.692 U5.15 | length 15.2
  Top Layer w0.305: v1(7.163,23.698) 7.332,23.698 9.012,22.018 Designator15.7@9.012,21.692 ; v1@11.354,24.511 v1(11.377,24.534) U5.15
  Bottom Layer w0.305: v1(7.163,23.698) 7.518,24.054 8.595,24.054 9.075,24.534 v1(11.377,24.534)
PB6: pad.0@26.695,32.588 R12.1 U4.13 U5.42 | length 30.8
  Top Layer w0.152: U5.42 26.356,22.534 26.709,22.887 26.709,22.911 27.263,22.911 27.381,23.028 28.55,23.028 28.667,22.911 29.187,22.911 ; v1(27.229,15.164) 27.945,15.164 28.275,15.494 28.042,15.728 28.428,15.728 29.187,16.487 29.187,22.911 ; pad.0@28.016,32.436 28.219,32.436 29.187,31.468 29.187,22.911
  Bottom Layer w0.152: U4.13@24.539,20.777 23.724,20.777 23.724,18.836 27.229,15.331 v1(27.229,15.164)
PB7: pad.0@26.695,31.572 R11.1 U4.14 U5.43 | length 17.9
  Top Layer w0.152: U5.43 26.1,23.034 26.101,23.036 26.354,23.036 26.356,23.034 26.709,23.387 26.709,23.68 26.693,23.696 26.924,23.927 28.082,23.927 R11.1 28.082,24.13 28.801,24.849 28.801,26.364 28.883,26.445 28.883,30.909 pad.0@28.143,31.648
  Bottom Layer w0.152: U4.14@24.539,21.277 24.217,21.6 24.217,23.557 25.019,24.359 26.678,24.359 27.414,23.622 27.838,23.622 27.889,23.571 v1(28.067,23.571)
RST: C16.2 R16.1 U5.7 | length 16.8
  Top Layer w0.152: R16.1@21.87,33.808 R16.1 21.844,34.011 C16.2 19.289,33.36 17.688,33.36 17.688,30.807 16.916,30.035 16.916,28.033 17.57,27.379 21.166,27.379 21.173,27.387 21.488,27.387 21.496,27.379 21.707,27.379 21.945,27.142 21.955,27.142 22.331,26.766 U5.7
SWCLK: P1.2 U5.37 | length 13.4
  Top Layer w0.152: U5.37 25.857,19.86 25.857,15.055 25.864,15.048 25.864,14.606 25.857,14.599 25.857,11.313 26.619,10.551 v1(26.619,8.433)
  Bottom Layer w0.152: P1.2@25.225,8.448 26.604,8.448 v1(26.619,8.433)
SWDIO: P1.3 U5.34 | length 16.4
  Top Layer w0.152: U5.34 24.477,19.187 24.477,18.862 24.771,18.568 24.771,10.993 24.496,10.717 24.496,9.728 24.689,9.535 24.689,7.874 v1(27.203,7.874)
  Bottom Layer w0.152: P1.3@25.225,7.798 27.127,7.798 v1(27.203,7.874)
TFT_BLK: R14.1 U5.29 | length 2.6
  Top Layer w0.152: R14.1@21.755,16.815 R14.1 21.831,17.144 U5.29
TFT_DC: U2.5 U5.27 | length 10.2
  Top Layer w0.152: U2.5@13.448,16.129 13.448,18.253 20.157,18.253 20.831,18.926 U5.27
TFT_LEDK: R10.2 U2.11 | length 7.8
  Top Layer w0.152: U2.11@17.648,16.129 17.648,17.495 17.704,17.551 19.345,17.551 19.451,17.445 19.451,16.071 R10.2@21.73,13.792
TFT_RES: U2.6 U5.28 | length 9.5
  Top Layer w0.152: U2.6@14.148,16.129 14.148,17.45 14.646,17.948 20.284,17.948 21.331,18.995 U5.28
TFT_SCL: U2.4 U5.26 | length 10.6
  Top Layer w0.152: U2.4@12.748,16.129 12.748,18.558 20.031,18.558 20.331,18.857 U5.26
TFT_SDA: U2.3 U5.21 | length 14.9
  Top Layer w0.152: U2.3@12.048,16.129 12.194,16.129 12.194,22.56 12.595,22.962 16.869,22.962 17.266,22.565 17.266,21.534 U5.21
USB_VCC: C1.2 P1.1 R2.2 R3.2 U1.4 U1.8 | length 50.3
  Top Layer w0.305: U1.8 1.321,19.125 2.338,20.142 5.383,20.142 6.158,19.367 R3.2 9.017,19.367 9.017,15.367 8.268,14.618 R2.2 6.159,13.233 U1.4 ; C1.2 3.569,7.823 5.335,7.823 5.361,7.798 5.866,7.798 5.923,7.855 7.245,7.855 7.423,8.034 7.423,9.086 7.245,9.265 5.252,9.265 5.131,9.385 U1.4 ; U1.4@5.131,13.818 U1.4
  Bottom Layer w0.305: v1(6.528,13.411) 10.841,9.098 P1.1@25.225,9.098
VCAP_1: C11.2 U5.22 | length 4.1
  Top Layer w0.152: C11.2 16.078,19.355 17.363,20.64 18.354,20.64 18.748,21.034 U5.22
VCC3V3: 
pads on no net: Designator15.2@15.362,33.414 Designator15.3 Designator15.4 Designator15.5@11.552,21.692 Designator15.6 Designator15.9@6.472,21.692 Designator15.10 P1.0 P1.4 R40_2.2 R41_1.2 R41_6_1_1_1.2 R42_3.2 R43_2.2 R44_1.2 R44_6_1_2.2 R45_1.2 S1.0 S2.0 S3.0 SW1.0 SW1.1 U2.1 U2.2 U2.9 U3.4 U4.2 U4.3 U4.4 U4.9 U4.10 U4.11 U5.2 U5.10 U5.11 U5.16 U5.17 U5.25 U5.30 U5.31 U5.32 U5.33 U5.38 U5.39 U5.40 U5.41 U5.45 U5.46 U10_1.1 U10_1.2 U10_1.3 U10_1.4 U10_1.5 U10_1.6 U10_1.7 U10_1.8 U10_1.9 U10_1.10 U10_1.11 U10_1.12 U10_1.13 U10_1.14 Y1.0
copper on no net: | length 22.9
  Bottom Layer w0.152: v1(32.327,20.745) 32.827,20.245 36.327,20.245 36.654,20.573 36.654,22.451 36.125,22.451
  Bottom Layer w0.254: v1@32.675,21.594 33.972,21.594 34.025,21.647 ; v1(32.827,22.745) 33.727,22.745 34.025,22.447 ; v1(35.327,23.745) 35.709,23.363 35.709,23.418 35.876,23.251
  Bottom Layer w0.381: v1(34.823,24.745) 34.679,24.601 34.679,23.477 34.823,23.333 34.823,21.651 36.125,21.651 ; v1(35.077,25.745) 35.327,25.495 35.327,25.491 35.966,24.851 36.126,24.851 36.125,24.051
  Bottom Layer w0.508: v1(32.327,20.745) 32.077,20.745 32.077,23.745 33.077,23.745 33.327,23.495 33.327,23.279 33.993,23.279 34.025,23.247
  other v1: 30.074,20.599 30.074,21.361 32.827,21.745 30.074,22.123 30.074,22.885 30.074,23.647 30.074,24.409
  other v2: 1.829,5.69 1.829,8.687

## Polygon pours and split planes (outlines as drawn)
GND on Bottom Layer "Top Layer-No Net" (solid, remove dead copper, pour order 12): 0.152,36.373 29.591,36.373 29.591,2.083 29.464,2.21 -0.051,2.21
GND on Top Layer "Top Layer-No Net" (solid, remove dead copper, pour order 14): 0.051,2.184 29.388,2.184 29.489,2.083 29.591,2.184 29.591,36.424 0.203,36.424 0.051,36.576

## Keep-outs
Keep-Out Layer:
  lines w0.152: 3.454,-0.127 cw(c3.454,0.889) 3.454,1.905 6.756,1.905 7.899,3.048 22.377,3.048 23.52,1.905 26.06,1.905 cw(c26.06,0.889) 26.06,-0.127 ; 3.531,38.405 ccw(c3.531,37.389) 3.531,36.373 26.264,36.373 ccw(c26.248,37.389) 26.264,38.405
  lines w0.254: 0.051,0.838 0.051,37.694 2.521,37.694 ; 0.083,0.806 2.489,0.806 ; 3.632,38.379 3.632,38.405 ; 26.054,38.405 26.264,38.405 ; 27.159,0.838 29.591,0.838 29.591,37.694 27.258,37.694 ; 29.591,20.345 30.577,20.345 30.577,17.043 33.503,17.043 33.503,19.075 36.424,19.075 37.567,20.218 37.567,25.679 37.567,26.187 36.932,26.822 36.297,27.457 33.503,27.457 33.503,29.172 33.503,29.87 ; 29.591,24.79 30.582,24.79 ; 30.507,17.056 33.433,17.056 ; 30.507,29.883 33.433,29.883 ; 30.577,24.79 30.577,29.87 ; 30.587,19.71 30.587,25.171

## Silkscreen, mask and mechanical layers (free items; w line width, h text height)
Bottom Overlay:
  lines w0.2: -0.838,13.773 5.032,13.773 5.032,17.837 -0.819,17.837 ; -0.813,13.773 -0.813,17.805 ; -0.793,21.525 5.077,21.525 5.077,25.589 -0.774,25.589 ; -0.768,21.525 -0.768,25.557 ; -0.736,29.032 5.134,29.032 5.134,33.096 -0.717,33.096 ; -0.711,29.032 -0.711,33.064
Mechanical 1:
  lines w0.152: 6.756,1.905 7.899,3.048 22.377,3.048 23.52,1.905 26.06,1.905 cw(c26.06,0.889) 26.06,-0.127